# Altium PCB uart.PcbDoc (part 2 of 3)
Units mil, origin at the board's own origin, x right, y up, seen from the top; angles counter-clockwise.
Board outline 2765.94 x 3947.04 mil, 2 copper layers (Top Layer, Bottom Layer); 105 components, 93 nets, 344 pads, 42 vias.
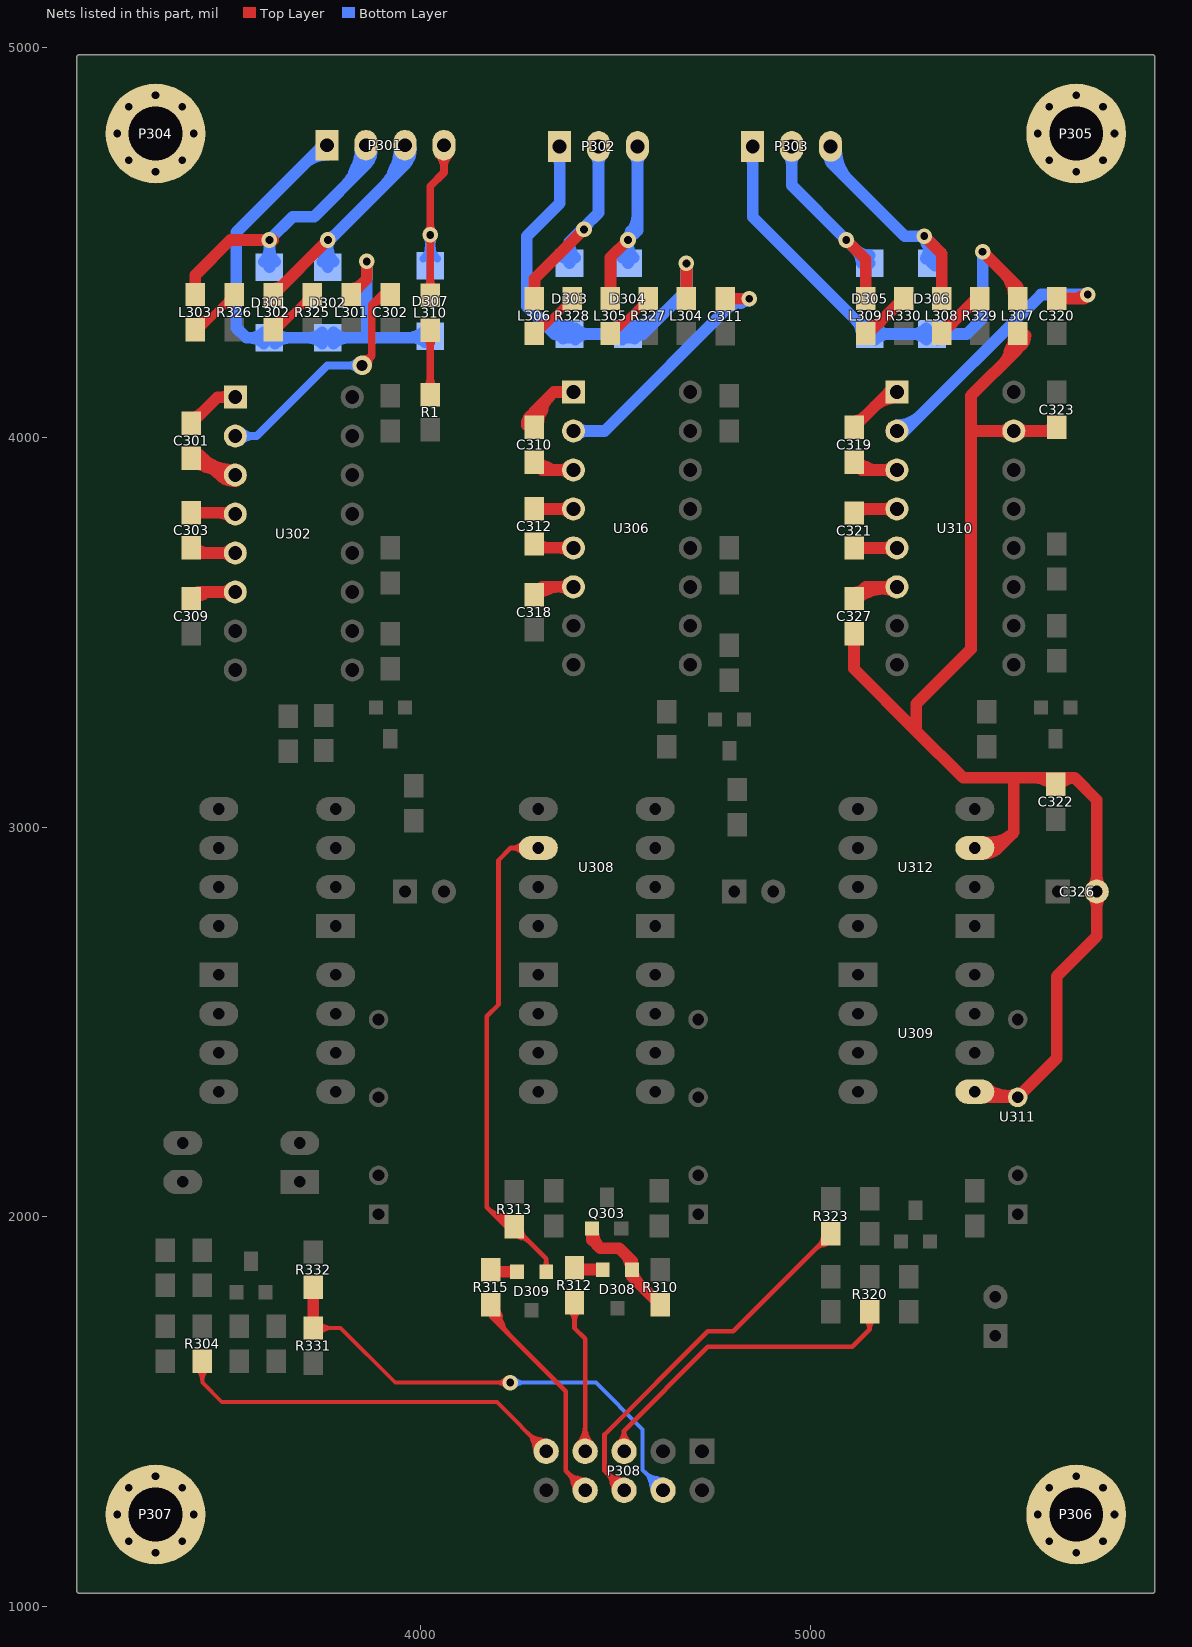
[diagram p2: the nets of this part, all layers, seen from the top]

## Via types
v1: diameter 40, hole 20, Top Layer to Bottom Layer, 40 vias
v2: diameter 50, hole 28, Top Layer to Bottom Layer, 2 vias

## Nets (pads, with @x,y where several pads share a name; then routed paths per layer and width w, separated by ;. In a path a pad name is that pad's centre, name@x,y a point inside that pad or via, vN(x,y) a via of type N, cw(c..) or ccw(c..) an arc to the next point about the centre after c; other vN are vias at no path point) (continued)
GND_5V_3: C322.2 C323.2 C326.2 C327.1 L307.1 U309.5 U310.15 U311.4 U312.3 | length 5137.7
  Top Layer w30: C327.1@5112.2,3496.85 5112.2,3406.85 5272.2,3246.85 ; U309.5@5422.2,2321.42 5436.77,2306.85 U311.4@5532.2,2306.85 5632.2,2406.85 5632.2,2617.2 5735,2720 C326.2@5735,2835 5735,3070 5678.15,3126.85 ; U312.3@5422.2,2946.85 5482.2,2946.85 5522.2,2986.85 ; U309.5@5452.53,2310.11 cw(c5471.21,2291.47) 5484.4,2314.32 ; 5510.59,4218.51 cw(c5565.77,4203.72) L307.1@5537.2,4253.19 ; L307.1@5532.2,4266.85 5532.2,4226.85 5412.2,4106.85 5412.2,4016.85 ; 5598.8,3121.86 ccw(c5610.51,3142.14) C322.2@5624.17,3123.12 ; C322.2@5630,3110 5630,3121.67 C322.2@5635.18,3126.85 ; C323.2@5632.2,4026.85 5622.2,4016.85 U310.15@5522.2,4016.85 5412.2,4016.85 ; C322.2@5636.32,3122.75 ccw(c5647.55,3136.51) 5657.44,3121.75 ; 5272.2,3246.85 5272.2,3316.85 5412.2,3456.85 5412.2,4016.85 ; 5272.2,3246.85 5392.2,3126.85 5522.2,3126.85 ; 5479.83,2946.85 cw(c5479.83,2985.48) 5452.52,2958.16 ccw(c5479.83,2985.48) 5479.83,2946.85 ; 5479.83,2946.85 ccw(c5479.83,2908.22) 5452.52,2935.54 cw(c5479.83,2908.22) 5479.83,2946.85 ; 5487.13,4016.85 cw(c5487.13,3981.78) 5511.93,4006.58 ccw(c5487.13,3981.78) 5487.13,4016.85 ; 5487.13,4016.85 ccw(c5487.13,4051.92) 5511.93,4027.12 cw(c5487.13,4051.92) 5487.13,4016.85 ; 5497.35,2311.58 ccw(c5507.53,2349.58) U311.4@5527.2,2315.51 ; 5497.35,2311.58 ccw(c5507.53,2349.58) U311.4@5527.2,2315.51 ; 5497.35,2311.58 ccw(c5507.53,2349.58) U311.4@5527.2,2315.51 ; 5522.2,2986.85 cw(c5460.09,3048.96) 5444.11,2962.58 ccw(c5460.09,3048.96) 5522.2,2986.85 ; 5522.2,2986.85 5522.2,3126.85 ; 5522.2,3126.85 C322.2@5635.18,3126.85 ; 5557.28,4016.85 cw(c5557.28,4051.92) 5532.48,4027.12 ccw(c5557.28,4051.92) 5557.28,4016.85 ; 5557.28,4016.85 ccw(c5557.28,3981.78) 5532.48,4006.58 cw(c5557.28,3981.78) 5557.28,4016.85 ; C322.2@5635.18,3126.85 5678.15,3126.85 ; 5678.15,3126.85 ccw(c5678.15,3072.88) 5637.53,3108.42 cw(c5678.15,3072.88) 5678.15,3126.85 ; 5735,2796.37 cw(c5773.63,2796.37) 5746.31,2823.69 ccw(c5773.63,2796.37) 5735,2796.37 ; 5735,2796.37 ccw(c5696.37,2796.37) 5723.69,2823.69 cw(c5696.37,2796.37) 5735,2796.37 ; 5735,2873.63 cw(c5696.37,2873.63) 5723.69,2846.31 ccw(c5696.37,2873.63) 5735,2873.63 ; 5735,2873.63 ccw(c5773.63,2873.63) 5746.31,2846.31 cw(c5773.63,2873.63) 5735,2873.63 ; U312.3@5438.66,2933.08 ccw(c5447.5,2980.87) 5481.86,2946.51 cw(c5447.5,2980.87) U312.3@5438.66,2933.08 ; U309.5@5452.52,2332.73 ccw(c5515,2395.21) 5515,2306.85 cw(c5515,2395.21) U309.5@5452.52,2332.73 ; 5490.38,4185.03 ccw(c5413.57,4261.85) 5522.2,4261.85 cw(c5413.57,4261.85) 5490.38,4185.03 ; 5541.6,4236.24 ccw(c5515.99,4261.85) 5552.2,4261.85 cw(c5515.99,4261.85) 5541.6,4236.24 ; 5577.25,3126.85 cw(c5577.25,3062.25) 5622.93,3107.93 ccw(c5577.25,3062.25) 5577.25,3126.85 ; 5595.99,4016.85 ccw(c5595.99,4058.06) 5625.13,4028.92 cw(c5595.99,4058.06) 5595.99,4016.85
NetC301_1: C301.1 U302.1 | length 307.3
  Top Layer w30: C301.1@3412.2,4036.85 3479.06,4103.7 U302.1@3524.72,4103.7 ; 3489.65,4103.7 cw(c3489.65,4068.63) 3514.45,4093.43 ccw(c3489.65,4068.63) 3489.65,4103.7 ; 3489.65,4103.7 ccw(c3489.65,4138.77) 3514.45,4113.97 cw(c3489.65,4138.77) 3489.65,4103.7 ; C301.1@3412.2,4051.85 ccw(c3412.2,4088.06) 3437.81,4062.46 cw(c3412.2,4088.06) C301.1@3412.2,4051.85
NetC301_2: C301.2 U302.3 | length 833.2
  Top Layer w30: C301.2@3412.2,3946.85 3442.2,3946.85 ; C301.2@3420.62,3947.25 ccw(c3468.72,3978.06) 3456.5,3922.26 ; 3458.83,3928.37 cw(c3445.82,3846.41) U302.3@3512.97,3895.17 ; U302.3@3524.72,3903.7 3485.35,3903.7 ; 3442.21,3946.85 ccw(c3512.8,4017.44) 3523.21,3918.15 cw(c3512.8,4017.44) 3442.21,3946.85 ; 3442.2,3946.85 3485.35,3903.7 ; 3485.35,3903.7 ccw(c3417.12,3835.48) 3412.67,3931.86 cw(c3417.12,3835.48) 3485.35,3903.7 ; 3489.65,3903.7 cw(c3489.65,3868.63) 3514.45,3893.43 ccw(c3489.65,3868.63) 3489.65,3903.7 ; 3489.65,3903.7 ccw(c3489.65,3938.77) 3514.45,3913.97 cw(c3489.65,3938.77) 3489.65,3903.7 ; C301.2@3411.28,3961.83 cw(c3412.88,3927.31) 3437.31,3951.75 ccw(c3412.88,3927.31) C301.2@3411.28,3961.83 ; 3486.7,3902.36 ccw(c3521.24,3936.9) 3526.34,3888.31 cw(c3521.24,3936.9) 3486.7,3902.36
NetC302_2: C302.2 U302.2 | length 1145.9
  Top Layer w20: v2(3850,4185) 3875,4210 ; C302.2@3922.2,4366.85 3901.85,4366.85 3875,4340 ; 3875,4210 cw(c3850.84,4234.15) 3850.26,4200 ccw(c3850.84,4234.15) 3875,4210 ; 3875,4210 ccw(c3899.15,4185.84) 3865,4185.26 cw(c3899.15,4185.84) 3875,4210 ; 3875,4210 3875,4340 ; 3875,4340 cw(c3901.64,4313.37) 3916.35,4348.04 ccw(c3901.64,4313.37) 3875,4340 ; 3895.97,4360.97 cw(c3914.13,4342.82) 3924.16,4366.45 ccw(c3914.13,4342.82) 3895.97,4360.97
  Bottom Layer w20: U302.2@3524.72,4003.7 3579.06,4003.7 3760.35,4185 v2(3850,4185) ; 3571.87,4003.7 cw(c3571.87,4050.84) 3538.53,4017.51 ccw(c3571.87,4050.84) 3571.87,4003.7 ; 3571.87,4003.7 ccw(c3571.87,3956.56) 3538.53,3989.89 cw(c3571.87,3956.56) 3571.87,4003.7 ; 3813.79,4185 cw(c3813.79,4148.79) 3839.39,4174.39 ccw(c3813.79,4148.79) 3813.79,4185 ; 3813.79,4185 ccw(c3813.79,4221.21) 3839.39,4195.61 cw(c3813.79,4221.21) 3813.79,4185
NetC303_1: C303.1 U302.5 | length 309.8
  Top Layer w30: C303.1@3412.2,3716.85 3425.35,3703.7 U302.5@3524.72,3703.7 ; 3489.65,3703.7 cw(c3489.65,3668.63) 3514.45,3693.43 ccw(c3489.65,3668.63) 3489.65,3703.7 ; 3489.65,3703.7 ccw(c3489.65,3738.77) 3514.45,3713.97 cw(c3489.65,3738.77) 3489.65,3703.7 ; C303.1@3419.28,3718.92 ccw(c3456.02,3755.67) 3456.02,3703.7 cw(c3456.02,3755.67) C303.1@3419.28,3718.92
NetC303_2: C303.2 U302.4 | length 185.8
  Top Layer w30: C303.2@3412.2,3806.85 3521.57,3806.85 U302.4@3524.72,3803.7 ; 3482.05,3806.85 cw(c3482.05,3761.02) 3514.45,3793.43 ccw(c3482.05,3761.02) 3482.05,3806.85
NetC309_2: C309.2 U302.6 | length 358
  Top Layer w30: C309.2@3412.2,3586.85 3429.06,3603.7 U302.6@3524.72,3603.7 ; C309.2@3418.04,3599.97 ccw(c3431.7,3618.99) 3443.41,3598.71 ; 3489.65,3603.7 cw(c3489.65,3568.63) 3514.45,3593.43 ccw(c3489.65,3568.63) 3489.65,3603.7 ; 3489.65,3603.7 ccw(c3489.65,3638.77) 3514.45,3613.97 cw(c3489.65,3638.77) 3489.65,3603.7 ; C309.2@3419.28,3584.78 cw(c3464.96,3539.1) 3464.96,3603.7 ccw(c3464.96,3539.1) C309.2@3419.28,3584.78
NetC310_1: C310.1 U306.1 | length 543.3
  Top Layer w30: C310.1@4287.2,4040.51 ccw(c4258.64,4089.98) 4313.82,4075.19 ; C310.1@4292.2,4026.85 4292.2,4066.85 4342.2,4116.85 U306.1@4392.2,4116.85 ; 4357.13,4116.85 cw(c4357.13,4081.78) 4381.93,4106.58 ccw(c4357.13,4081.78) 4357.13,4116.85 ; 4357.13,4116.85 ccw(c4357.13,4151.92) 4381.93,4127.12 cw(c4357.13,4151.92) 4357.13,4116.85 ; C310.1@4272.2,4031.85 cw(c4308.42,4031.85) 4282.81,4057.46 ccw(c4308.42,4031.85) C310.1@4272.2,4031.85 ; C310.1@4302.2,4031.85 cw(c4410.84,4031.85) 4334.02,4108.67 ccw(c4410.84,4031.85) C310.1@4302.2,4031.85
NetC310_2: C310.2 U306.3 | length 369.6
  Top Layer w30: C310.2@4292.2,3936.85 4312.2,3916.85 U306.3@4392.2,3916.85 ; C310.2@4296.78,3922.96 cw(c4311.81,3893.78) 4328.23,3922.21 ; 4357.13,3916.85 cw(c4357.13,3881.78) 4381.93,3906.58 ccw(c4357.13,3881.78) 4357.13,3916.85 ; 4357.13,3916.85 ccw(c4357.13,3951.92) 4381.93,3927.12 cw(c4357.13,3951.92) 4357.13,3916.85 ; C310.2@4299.28,3938.92 ccw(c4352.56,3992.21) 4352.56,3916.85 cw(c4352.56,3992.21) C310.2@4299.28,3938.92
NetC311_2: C311.2 U306.2 | length 925.3
  Top Layer w30: C311.2@4782.2,4355.85 v1(4843.2,4355.85)
  Bottom Layer w30: U306.2@4392.2,4016.85 4472.2,4016.85 4811.2,4355.85 v1(4843.2,4355.85) ; 4821.53,4345.04 ccw(c4814.14,4372.63) v1@4838.87,4358.35 ; 4427.28,4016.85 cw(c4427.28,4051.92) 4402.48,4027.12 ccw(c4427.28,4051.92) 4427.28,4016.85 ; 4427.28,4016.85 ccw(c4427.28,3981.78) 4402.48,4006.58 cw(c4427.28,3981.78) 4427.28,4016.85 ; 4780.04,4324.69 cw(c4843.2,4261.52) 4843.2,4350.85 ccw(c4843.2,4261.52) 4780.04,4324.69
NetC312_1: C312.1 U306.5 | length 279.1
  Top Layer w30: C312.1@4292.2,3726.85 4302.2,3716.85 U306.5@4392.2,3716.85 ; 4357.13,3716.85 cw(c4357.13,3681.78) 4381.93,3706.58 ccw(c4357.13,3681.78) 4357.13,3716.85 ; 4357.13,3716.85 ccw(c4357.13,3751.92) 4381.93,3727.12 cw(c4357.13,3751.92) 4357.13,3716.85 ; C312.1@4299.28,3728.92 ccw(c4328.42,3758.06) 4328.42,3716.85 cw(c4328.42,3758.06) C312.1@4299.28,3728.92
NetC312_2: C312.2 U306.4 | length 210.2
  Top Layer w30: C312.2@4292.2,3816.85 U306.4@4392.2,3816.85 ; 4357.13,3816.85 cw(c4357.13,3781.78) 4381.93,3806.58 ccw(c4357.13,3781.78) 4357.13,3816.85 ; 4357.13,3816.85 ccw(c4357.13,3851.92) 4381.93,3827.12 cw(c4357.13,3851.92) 4357.13,3816.85
NetC318_2: C318.2 U306.6 | length 369.6
  Top Layer w30: C318.2@4292.2,3596.85 4312.2,3616.85 U306.6@4392.2,3616.85 ; C318.2@4296.78,3610.74 ccw(c4311.81,3639.92) 4328.23,3611.49 ; 4357.13,3616.85 cw(c4357.13,3581.78) 4381.93,3606.58 ccw(c4357.13,3581.78) 4357.13,3616.85 ; 4357.13,3616.85 ccw(c4357.13,3651.92) 4381.93,3627.12 cw(c4357.13,3651.92) 4357.13,3616.85 ; C318.2@4299.28,3594.78 cw(c4352.56,3541.5) 4352.56,3616.85 ccw(c4352.56,3541.5) C318.2@4299.28,3594.78
NetC319_1: C319.1 U310.1 | length 335.1
  Top Layer w30: C319.1@5112.2,4026.85 5202.2,4116.85 U310.1@5222.2,4116.85 ; C319.1@5112.2,4041.85 ccw(c5112.2,4078.06) 5137.81,4052.46 cw(c5112.2,4078.06) C319.1@5112.2,4041.85 ; 5163.26,4077.91 cw(c5222.2,4018.97) 5222.2,4102.32 ccw(c5222.2,4018.97) 5163.26,4077.91
NetC319_2: C319.2 U310.3 | length 379.6
  Top Layer w30: C319.2@5112.2,3936.85 5132.2,3916.85 U310.3@5222.2,3916.85 ; C319.2@5116.78,3922.96 cw(c5131.81,3893.78) 5148.23,3922.21 ; 5187.13,3916.85 cw(c5187.13,3881.78) 5211.93,3906.58 ccw(c5187.13,3881.78) 5187.13,3916.85 ; 5187.13,3916.85 ccw(c5187.13,3951.92) 5211.93,3927.12 cw(c5187.13,3951.92) 5187.13,3916.85 ; C319.2@5119.28,3938.92 ccw(c5172.56,3992.21) 5172.56,3916.85 cw(c5172.56,3992.21) C319.2@5119.28,3938.92
NetC320_2: C320.2 U310.2 | length 943.7
  Top Layer w30: C320.2@5632.2,4356.85 5702.2,4356.85 v1(5712.2,4366.85) ; 5690.37,4359.82 cw(c5703.12,4337.74) v1@5710.71,4362.08 ; 5675.99,4356.85 ccw(c5675.99,4403.06) 5708.67,4370.39 cw(c5675.99,4403.06) 5675.99,4356.85
  Bottom Layer w30: U310.2@5222.2,4016.85 5242.2,4016.85 5592.2,4366.85 v1(5712.2,4366.85) ; U310.2@5222.2,4031.38 ccw(c5222.2,4114.73) 5281.15,4055.79 cw(c5222.2,4114.73) U310.2@5222.2,4031.38
NetC321_1: C321.1 U310.5 | length 220.4
  Top Layer w30: C321.1@5112.2,3716.44 5221.79,3716.44 U310.5@5222.2,3716.85 ; 5186.13,3716.44 ccw(c5186.13,3752.92) 5211.93,3727.12 cw(c5186.13,3752.92) 5186.13,3716.44 ; 5188.13,3716.44 cw(c5188.13,3682.78) 5211.93,3706.58 ccw(c5188.13,3682.78) 5188.13,3716.44
NetC321_2: C321.2 U310.4 | length 291.5
  Top Layer w30: C321.2@5112.2,3806.44 5122.62,3816.85 U310.4@5222.2,3816.85 ; 5187.13,3816.85 cw(c5187.13,3781.78) 5211.93,3806.58 ccw(c5187.13,3781.78) 5187.13,3816.85 ; 5187.13,3816.85 ccw(c5187.13,3851.92) 5211.93,3827.12 cw(c5187.13,3851.92) 5187.13,3816.85 ; C321.2@5119.28,3804.37 cw(c5149.42,3774.22) 5149.42,3816.85 ccw(c5149.42,3774.22) C321.2@5119.28,3804.37
NetC327_2: C327.2 U310.6 | length 551.6
  Top Layer w30: C327.2@5112.2,3586.85 5142.2,3616.85 U310.6@5222.2,3616.85 ; C327.2@5114.79,3601.51 ccw(c5129.58,3656.68) 5158.14,3607.22 ; 5171.23,3610.02 cw(c5186.14,3554.38) U310.6@5214.94,3604.27 ; 5187.13,3616.85 cw(c5187.13,3581.78) 5211.93,3606.58 ccw(c5187.13,3581.78) 5187.13,3616.85 ; 5187.13,3616.85 ccw(c5187.13,3651.92) 5211.93,3627.12 cw(c5187.13,3651.92) 5187.13,3616.85 ; C327.2@5112.2,3601.85 ccw(c5112.2,3638.06) 5137.81,3612.46 cw(c5112.2,3638.06) C327.2@5112.2,3601.85 ; C327.2@5119.28,3584.78 cw(c5196.7,3507.35) 5196.7,3616.85 ccw(c5196.7,3507.35) C327.2@5119.28,3584.78
NetD301_1: D301.1 D302.1 D307.1 L301.2 P301.1 | length 2342
  Top Layer w30: L301.2@3822.2,4366.85 3862.2,4406.85 v1(3862.2,4451.85) ; L301.2@3822.2,4381.85 ccw(c3822.2,4418.06) 3847.81,4392.46 cw(c3822.2,4418.06) L301.2@3822.2,4381.85
  Bottom Layer w30: P301.1@3760,4750 3750.35,4750 3527.2,4526.85 3527.2,4281.85 3553.31,4255.75 D301.1@3612.2,4255.75 D302.1@3762.2,4255.75 3870,4255.75 ; v1(3862.2,4451.85) 3862.2,4263.54 3870,4255.75 ; D307.1@4025,4259.45 4021.3,4255.75 3870,4255.75 ; 3562.88,4255.75 cw(c3562.88,4206.42) 3597.76,4241.3 ccw(c3562.88,4206.42) 3562.88,4255.75 ; 3562.88,4255.75 ccw(c3562.88,4305.08) 3597.76,4270.2 cw(c3562.88,4305.08) 3562.88,4255.75 ; 3661.53,4255.75 cw(c3661.53,4305.08) 3626.65,4270.2 ccw(c3661.53,4305.08) 3661.53,4255.75 ; 3661.53,4255.75 ccw(c3661.53,4206.42) 3626.65,4241.3 cw(c3661.53,4206.42) 3661.53,4255.75 ; 3712.88,4255.75 cw(c3712.88,4206.42) 3747.76,4241.3 ccw(c3712.88,4206.42) 3712.88,4255.75 ; 3712.88,4255.75 ccw(c3712.88,4305.08) 3747.76,4270.2 cw(c3712.88,4305.08) 3712.88,4255.75 ; 3811.53,4255.75 cw(c3811.53,4305.08) 3776.65,4270.2 ccw(c3811.53,4305.08) 3811.53,4255.75 ; 3811.53,4255.75 ccw(c3811.53,4206.42) 3776.65,4241.3 cw(c3811.53,4206.42) 3811.53,4255.75 ; 3701.93,4701.58 cw(c3760,4643.51) 3760,4725.63 ccw(c3760,4643.51) 3701.93,4701.58 ; 3966.74,4255.75 ccw(c3966.74,4317.71) 4010.55,4273.9 cw(c3966.74,4317.71) 3966.74,4255.75 ; 3984.6,4255.75 cw(c3984.6,4219.05) 4010.55,4245 ccw(c3984.6,4219.05) 3984.6,4255.75
NetD301_2: D301.2 L303.2 P301.2 | length 1366.4
  Top Layer w30: L303.2@3422.2,4366.85 3422.2,4416.85 3512.2,4506.85 v1(3612.2,4506.85) v1@3622.2,4506.85
  Bottom Layer w30: D301.2@3612.2,4436.85 v1(3612.2,4506.85) 3672.2,4566.85 3726.85,4566.85 3860,4700 P301.2@3860,4750 ; 3828.6,4677.19 cw(c3908.75,4655.71) P301.2@3867.26,4727.58 ; 3612.2,4486.18 cw(c3562.88,4486.18) 3597.76,4451.3 ccw(c3562.88,4486.18) 3612.2,4486.18 ; 3612.2,4486.18 ccw(c3661.53,4486.18) 3626.65,4451.3 cw(c3661.53,4486.18) 3612.2,4486.18 ; 3860,4705.09 cw(c3895.07,4705.09) 3870.27,4729.89 ccw(c3895.07,4705.09) 3860,4705.09 ; 3860,4705.09 ccw(c3824.93,4705.09) 3849.73,4729.89 cw(c3824.93,4705.09) 3860,4705.09 ; 3806.8,4646.8 ccw(c3713.45,4740.16) 3845.47,4740.16 cw(c3713.45,4740.16) 3806.8,4646.8 ; 3858.02,4698.02 ccw(c3815.88,4740.16) 3875.47,4740.16 cw(c3815.88,4740.16) 3858.02,4698.02
NetD302_2: D302.2 L302.2 P301.3 | length 1320.6
  Top Layer w30: L302.2@3622.2,4366.85 v1(3762.2,4506.85) ; L302.2@3622.2,4381.85 ccw(c3622.2,4418.06) 3647.81,4392.46 cw(c3622.2,4418.06) L302.2@3622.2,4381.85
  Bottom Layer w30: D302.2@3762.2,4436.85 v1(3762.2,4506.85) 3766.85,4506.85 3960,4700 P301.3@3960,4750 ; 3928.6,4677.19 cw(c4008.75,4655.71) P301.3@3967.26,4727.58 ; 3762.2,4486.18 cw(c3712.88,4486.18) 3747.76,4451.3 ccw(c3712.88,4486.18) 3762.2,4486.18 ; 3762.2,4486.18 ccw(c3811.53,4486.18) 3776.65,4451.3 cw(c3811.53,4486.18) 3762.2,4486.18 ; 3960,4705.09 cw(c3995.07,4705.09) 3970.27,4729.89 ccw(c3995.07,4705.09) 3960,4705.09 ; 3960,4705.09 ccw(c3924.93,4705.09) 3949.73,4729.89 cw(c3924.93,4705.09) 3960,4705.09 ; v1@3762.2,4511.85 ccw(c3762.2,4535.14) 3778.67,4518.67 cw(c3762.2,4535.14) v1@3762.2,4511.85 ; 3906.8,4646.8 ccw(c3813.45,4740.16) 3945.47,4740.16 cw(c3813.45,4740.16) 3906.8,4646.8 ; 3958.02,4698.02 ccw(c3915.88,4740.16) 3975.47,4740.16 cw(c3915.88,4740.16) 3958.02,4698.02
NetD303_1: D303.1 D304.1 L304.2 P302.1 | length 2390.5
  Top Layer w30: L304.2@4682.2,4356.85 v1(4682.2,4446.85)
  Bottom Layer w30: P302.1@4356.78,4746.85 4356.78,4601.43 4272.2,4516.85 4272.2,4336.85 4343.31,4265.75 ; v1(4682.2,4446.85) 4682.2,4376.85 4571.1,4265.75 ; 4343.31,4265.75 cw(c4343.31,4238.94) 4365.38,4254.15 ccw(c4343.31,4238.94) 4343.31,4265.75 ; 4343.31,4265.75 ccw(c4343.31,4292.55) 4365.38,4277.34 cw(c4343.31,4292.55) 4343.31,4265.75 ; 4343.31,4265.75 D303.1@4382.2,4265.75 D304.1@4532.2,4265.75 4571.1,4265.75 ; 4356.78,4701.94 cw(c4391.85,4701.94) 4367.05,4726.74 ccw(c4391.85,4701.94) 4356.78,4701.94 ; 4356.78,4701.94 ccw(c4321.71,4701.94) 4346.51,4726.74 cw(c4321.71,4701.94) 4356.78,4701.94 ; 4431.53,4265.75 cw(c4431.53,4315.08) 4396.65,4280.2 ccw(c4431.53,4315.08) 4431.53,4265.75 ; 4431.53,4265.75 ccw(c4431.53,4216.42) 4396.65,4251.3 cw(c4431.53,4216.42) 4431.53,4265.75 ; 4482.88,4265.75 cw(c4482.88,4216.42) 4517.76,4251.3 ccw(c4482.88,4216.42) 4482.88,4265.75 ; 4482.88,4265.75 ccw(c4482.88,4315.08) 4517.76,4280.2 cw(c4482.88,4315.08) 4482.88,4265.75 ; 4571.1,4265.75 cw(c4571.1,4292.55) 4549.03,4277.34 ccw(c4571.1,4292.55) 4571.1,4265.75 ; 4571.1,4265.75 ccw(c4571.1,4238.94) 4549.03,4254.15 cw(c4571.1,4238.94) 4571.1,4265.75 ; 4280.92,4328.13 ccw(c4382.2,4429.42) 4382.2,4286.18 cw(c4382.2,4429.42) 4280.92,4328.13 ; 4332.13,4276.92 ccw(c4382.2,4326.99) 4382.2,4256.18 cw(c4382.2,4326.99) 4332.13,4276.92 ; D304.1@4532.2,4256.18 ccw(c4532.2,4326.99) 4582.28,4276.92 cw(c4532.2,4326.99) D304.1@4532.2,4256.18 ; D304.1@4532.2,4286.18 ccw(c4532.2,4429.42) 4633.49,4328.13 cw(c4532.2,4429.42) D304.1@4532.2,4286.18
NetD303_2: D303.2 L306.2 P302.2 | length 906.9
  Top Layer w30: L306.2@4292.2,4356.85 4292.2,4406.85 v1(4419.49,4534.14)
  Bottom Layer w30: D303.2@4382.2,4446.85 4382.2,4501.85 v1@4419.49,4539.14 ; v1(4419.49,4534.14) v1@4419.49,4539.14 ; P302.2@4456.78,4746.85 4456.78,4576.43 v1@4419.49,4539.14 ; 4382.2,4496.18 cw(c4332.88,4496.18) 4367.76,4461.3 ccw(c4332.88,4496.18) 4382.2,4496.18 ; 4382.2,4496.18 ccw(c4431.53,4496.18) 4396.65,4461.3 cw(c4431.53,4496.18) 4382.2,4496.18 ; 4456.78,4701.94 cw(c4491.85,4701.94) 4467.05,4726.74 ccw(c4491.85,4701.94) 4456.78,4701.94 ; 4456.78,4701.94 ccw(c4421.71,4701.94) 4446.51,4726.74 cw(c4421.71,4701.94) 4456.78,4701.94 ; 4402.42,4522.07 cw(c4419.49,4505) 4419.49,4529.14 ccw(c4419.49,4505) 4402.42,4522.07 ; v1@4424.49,4534.14 cw(c4448.63,4534.14) 4431.56,4551.21 ccw(c4448.63,4534.14) v1@4424.49,4534.14
NetD304_2: D304.2 L305.2 P302.3 | length 917.2
  Top Layer w30: L305.2@4487.2,4356.85 4487.2,4461.85 v1(4532.2,4506.85)
  Bottom Layer w30: D304.2@4532.2,4446.85 v1(4532.2,4506.85) 4556.78,4531.43 P302.3@4556.78,4746.85 ; v1@4537.03,4508.14 cw(c4564.62,4515.54) 4539.89,4529.82 ; v1@4532.2,4496.18 cw(c4482.88,4496.18) 4517.76,4461.3 ccw(c4482.88,4496.18) v1@4532.2,4496.18 ; v1@4532.2,4496.18 ccw(c4581.53,4496.18) 4546.65,4461.3 cw(c4581.53,4496.18) v1@4532.2,4496.18 ; 4556.78,4701.94 cw(c4591.85,4701.94) 4567.05,4726.74 ccw(c4591.85,4701.94) 4556.78,4701.94 ; 4556.78,4701.94 ccw(c4521.71,4701.94) 4546.51,4726.74 cw(c4521.71,4701.94) 4556.78,4701.94 ; v1@4528.67,4510.39 ccw(c4460.8,4578.25) 4556.78,4578.25 cw(c4460.8,4578.25) v1@4528.67,4510.39
NetD305_1: D305.1 D306.1 L307.2 P303.1 | length 2147.3
  Top Layer w30: v1(5442.2,4476.85) 5532.2,4386.85 L307.2@5532.2,4356.85 ; 5510.59,4405.19 ccw(c5565.77,4419.98) L307.2@5537.2,4370.51 ; 5497.46,4421.6 cw(c5437.71,4361.85) 5522.2,4361.85 ccw(c5437.71,4361.85) 5497.46,4421.6
  Bottom Layer w30: P303.1@4852.2,4746.85 4852.2,4565.75 D305.1@5152.2,4265.75 D306.1@5312.2,4265.75 5401.1,4265.75 5442.2,4306.85 v1(5442.2,4476.85) ; 4852.2,4701.94 cw(c4887.28,4701.94) 4862.48,4726.74 ccw(c4887.28,4701.94) 4852.2,4701.94 ; 4852.2,4701.94 ccw(c4817.13,4701.94) 4841.93,4726.74 cw(c4817.13,4701.94) 4852.2,4701.94 ; D305.1@5117.32,4300.63 cw(c5082.44,4265.75) 5131.77,4265.75 ccw(c5082.44,4265.75) D305.1@5117.32,4300.63 ; D305.1@5117.32,4300.63 ccw(c5152.2,4335.51) 5152.2,4286.18 cw(c5152.2,4335.51) D305.1@5117.32,4300.63 ; 5201.53,4265.75 cw(c5201.53,4315.08) 5166.65,4280.2 ccw(c5201.53,4315.08) 5201.53,4265.75 ; 5201.53,4265.75 ccw(c5201.53,4216.42) 5166.65,4251.3 cw(c5201.53,4216.42) 5201.53,4265.75 ; 5262.88,4265.75 cw(c5262.88,4216.42) 5297.76,4251.3 ccw(c5262.88,4216.42) 5262.88,4265.75 ; 5262.88,4265.75 ccw(c5262.88,4315.08) 5297.76,4280.2 cw(c5262.88,4315.08) 5262.88,4265.75 ; 5361.53,4265.75 cw(c5361.53,4315.08) 5326.65,4280.2 ccw(c5361.53,4315.08) 5361.53,4265.75 ; 5361.53,4265.75 ccw(c5361.53,4216.42) 5326.65,4251.3 cw(c5361.53,4216.42) 5361.53,4265.75
NetD305_2: D305.2 L309.2 P303.2 | length 818.7
  Top Layer w30: v1(5092.2,4506.85) 5142.2,4456.85 L309.2@5142.2,4356.85
  Bottom Layer w30: P303.2@4952.2,4746.85 4952.2,4646.85 v1(5092.2,4506.85) D305.2@5152.2,4446.85 ; 4952.2,4701.94 cw(c4987.28,4701.94) 4962.48,4726.74 ccw(c4987.28,4701.94) 4952.2,4701.94 ; 4952.2,4701.94 ccw(c4917.13,4701.94) 4941.93,4726.74 cw(c4917.13,4701.94) 4952.2,4701.94 ; D305.2@5117.32,4481.73 cw(c5082.44,4446.85) 5131.77,4446.85 ccw(c5082.44,4446.85) D305.2@5117.32,4481.73 ; D305.2@5117.32,4481.73 ccw(c5152.2,4516.61) 5152.2,4467.28 cw(c5152.2,4516.61) D305.2@5117.32,4481.73
NetD306_2: D306.2 L308.2 P303.3 | length 1546.3
  Top Layer w30: v1(5292.2,4516.85) 5337.2,4471.85 L308.2@5337.2,4356.85
  Bottom Layer w30: P303.3@5044.94,4724.43 cw(c5003.45,4652.56) 5083.6,4674.04 ; P303.3@5052.2,4746.85 5052.2,4706.85 ; D306.2@5295.98,4459.26 ccw(c5265.51,4482.57) 5302.56,4492.49 ; v1@5297.03,4515.56 ccw(c5324.62,4508.16) 5299.89,4493.88 ; 5303.41,4489.32 ccw(c5342.82,4499.89) D306.2@5322.42,4464.55 ; D306.2@5312.2,4446.85 5312.2,4496.85 v1(5292.2,4516.85) ; 5052.2,4706.85 cw(c5076.24,4706.85) 5061.26,4725.65 ccw(c5076.24,4706.85) 5052.2,4706.85 ; 5052.2,4706.85 ccw(c5028.17,4706.85) 5043.15,4725.65 cw(c5028.17,4706.85) 5052.2,4706.85 ; 5052.2,4706.85 5242.2,4516.85 v1(5292.2,4516.85) ; v1@5292.21,4516.85 cw(c5261.26,4485.91) 5295.99,4459.28 ccw(c5261.26,4485.91) v1@5292.21,4516.85 ; 5312.2,4496.18 cw(c5262.88,4496.18) 5297.76,4461.3 ccw(c5262.88,4496.18) 5312.2,4496.18 ; 5312.2,4496.18 ccw(c5361.53,4496.18) 5326.65,4461.3 cw(c5361.53,4496.18) 5312.2,4496.18 ; P303.3@5066.73,4737.01 ccw(c5174.61,4737.01) 5098.33,4660.73 cw(c5174.61,4737.01) P303.3@5066.73,4737.01 ; v1@5288.67,4513.31 cw(c5231.85,4456.5) 5312.2,4456.5 ccw(c5231.85,4456.5) v1@5288.67,4513.31 ; 5316.4,4492.65 cw(c5288.66,4464.9) 5319.8,4441.03 ccw(c5288.66,4464.9) 5316.4,4492.65
NetD307_2: D307.2 L310.2 P301.4 | length 1350.2
  Top Layer w20: L310.2@4025,4365 v1(4025,4520) 4025,4645 4060,4680 P301.4@4060,4750 ; 4025,4406.21 cw(c3988.79,4406.21) 4014.39,4380.61 ccw(c3988.79,4406.21) 4025,4406.21 ; 4025,4406.21 ccw(c4061.21,4406.21) 4035.61,4380.61 cw(c4061.21,4406.21) 4025,4406.21 ; 4025,4495.86 cw(c4049.14,4495.86) 4032.07,4512.93 ccw(c4049.14,4495.86) 4025,4495.86 ; 4025,4495.86 ccw(c4000.86,4495.86) 4017.93,4512.93 cw(c4000.86,4495.86) 4025,4495.86 ; 4025,4544.14 cw(c4000.86,4544.14) 4017.93,4527.07 ccw(c4000.86,4544.14) 4025,4544.14 ; 4025,4544.14 ccw(c4049.14,4544.14) 4032.07,4527.07 cw(c4049.14,4544.14) 4025,4544.14 ; 4060,4693.01 cw(c4107.14,4693.01) 4073.81,4726.35 ccw(c4107.14,4693.01) 4060,4693.01 ; 4060,4693.01 ccw(c4012.86,4693.01) 4046.19,4726.35 cw(c4012.86,4693.01) 4060,4693.01
  Bottom Layer w20: D307.2@4025,4440.55 v1(4025,4520) ; v1@4016.34,4515 cw(c3981.62,4494.95) 4020.34,4484.58 ; v1@4016.34,4515 cw(c3981.62,4494.95) 4020.34,4484.58 ; v1@4016.34,4515 cw(c3981.62,4494.95) 4020.34,4484.58 ; 4025,4495.86 cw(c4049.14,4495.86) 4032.07,4512.93 ccw(c4049.14,4495.86) 4025,4495.86 ; 4025,4495.86 ccw(c4000.86,4495.86) 4017.93,4512.93 cw(c4000.86,4495.86) 4025,4495.86 ; v1@4025,4501.95 cw(c3963.6,4501.95) 4007.02,4458.54 ccw(c3963.6,4501.95) v1@4025,4501.95 ; v1@4025,4501.95 ccw(c4086.4,4501.95) 4042.98,4458.54 cw(c4086.4,4501.95) v1@4025,4501.95 ; 4029.66,4484.58 cw(c4068.38,4494.95) v1@4033.66,4515 ; 4029.66,4484.58 cw(c4068.38,4494.95) v1@4033.66,4515 ; 4029.66,4484.58 cw(c4068.38,4494.95) v1@4033.66,4515
NetD308_1: D308.1 Q303.1 R310.1 | length 630
  Top Layer w30: Q303.1@4440,1970 4440,1941.06 4461.06,1920 ; R310.1@4615,1775 4614.64,1775 4542.4,1847.24 D308.1@4542.4,1864.21 4542.4,1887.6 4510,1920 4461.06,1920 ; 4461.05,1920 cw(c4505.26,1964.21) 4442.99,1969.73 ccw(c4505.26,1964.21) 4461.05,1920 ; 4521.92,1908.08 cw(c4479.04,1865.2) 4539.69,1865.2 ccw(c4479.04,1865.2) 4521.92,1908.08 ; D308.1@4545.12,1863.23 ccw(c4590.27,1863.23) 4558.34,1831.3 cw(c4590.27,1863.23) D308.1@4545.12,1863.23 ; 4588.79,1800.86 ccw(c4615,1827.07) 4615,1790 cw(c4615,1827.07) 4588.79,1800.86
NetD308_2: D308.2 R312.2 | length 75
  Top Layer w30: R312.2@4395,1870 4400,1865 4466.81,1865 D308.2@4467.6,1864.21
NetD309_1: D309.1 R313.1 U308.6 | length 2135.3
  Top Layer w12: 4212.05,2004.38 cw(c4202.01,1954.8) R313.1@4244.17,1982.76 ; 4212.38,1992.49 ccw(c4216.9,2014.82) R313.1@4229.5,1995.83 ; 4214.12,1992.14 cw(c4208.59,1964.79) R313.1@4233.7,1976.95 ; R313.1@4235.21,1968.58 ccw(c4266.81,1977.94) R313.1@4258.28,1946.1 ; U308.6@4302.2,2946.85 4231.85,2946.85 ; D309.1@4322.4,1859.21 4322.4,1892.6 R313.1@4240,1975 4220,1975 4170,2025 ; 4170,2025 ccw(c4233.27,2088.26) 4238.82,1998.96 cw(c4233.27,2088.26) 4170,2025 ; 4170,2025 4170,2515 4200,2545 4200,2915 4231.85,2946.85 ; 4231.85,2946.85 cw(c4231.85,2906.61) 4263.53,2931.43 ccw(c4231.85,2906.61) 4231.85,2946.85 ; 4231.85,2946.85 ccw(c4231.85,2987.09) 4263.53,2962.27 cw(c4231.85,2987.09) 4231.85,2946.85 ; 4322.4,1888.48 cw(c4294.12,1888.48) 4314.12,1868.48 ccw(c4294.12,1888.48) 4322.4,1888.48 ; 4322.4,1888.48 ccw(c4350.69,1888.48) 4330.69,1868.48 cw(c4350.69,1888.48) 4322.4,1888.48 ; 4188.81,2006.19 ccw(c4235.47,2052.84) 4239.57,1986.99 cw(c4235.47,2052.84) 4188.81,2006.19 ; 4207.63,1987.37 ccw(c4237.67,2017.42) 4240.31,1975.01 cw(c4237.67,2017.42) 4207.63,1987.37 ; R313.1@4240,1951 cw(c4240,1893.06) 4280.97,1934.03 ccw(c4240,1893.06) R313.1@4240,1951 ; R313.1@4240,1963 cw(c4240,1934.03) 4260.49,1954.51 ccw(c4240,1934.03) R313.1@4240,1963 ; R313.1@4259,1970 ccw(c4292.8,1970) 4268.9,1946.1 cw(c4292.8,1970) R313.1@4259,1970
NetD309_2: D309.2 R315.1 | length 112.1
  Top Layer w30: R315.1@4180,1865 4185.79,1859.21 D309.2@4247.6,1859.21 ; R315.1@4187.07,1867.07 ccw(c4206.04,1886.04) 4206.04,1859.21 cw(c4206.04,1886.04) R315.1@4187.07,1867.07
NetL302_1: L302.1 R325.1 | length 393.1
  Top Layer w20: L302.1@3617.76,4284.13 cw(c3647.87,4268.69) L302.1@3639.11,4301.38 ; L302.1@3622.2,4276.85 3632.2,4276.85 R325.1@3722.2,4366.85 ; L302.1@3622.2,4296.85 ccw(c3622.2,4369.28) 3673.42,4318.06 cw(c3622.2,4369.28) L302.1@3622.2,4296.85 ; 3688.06,4332.71 cw(c3722.2,4298.57) 3722.2,4346.85 ccw(c3722.2,4298.57) 3688.06,4332.71 ; R325.1@3700.13,4344.78 ccw(c3683.06,4361.85) 3707.2,4361.85 cw(c3683.06,4361.85) R325.1@3700.13,4344.78
NetL303_1: L303.1 R326.1 | length 393.1
  Top Layer w20: L303.1@3417.76,4284.13 cw(c3447.87,4268.69) L303.1@3439.11,4301.38 ; L303.1@3422.2,4276.85 3432.2,4276.85 R326.1@3522.2,4366.85 ; L303.1@3422.2,4296.85 ccw(c3422.2,4369.28) 3473.42,4318.06 cw(c3422.2,4369.28) L303.1@3422.2,4296.85 ; 3488.06,4332.71 cw(c3522.2,4298.57) 3522.2,4346.85 ccw(c3522.2,4298.57) 3488.06,4332.71 ; R326.1@3500.13,4344.78 ccw(c3483.06,4361.85) 3507.2,4361.85 cw(c3483.06,4361.85) R326.1@3500.13,4344.78
NetL305_1: L305.1 R327.1 | length 352.8
  Top Layer w20: L305.1@4487.2,4266.85 4494.7,4266.85 R327.1@4584.7,4356.85 ; L305.1@4487.2,4286.85 ccw(c4487.2,4353.24) 4534.15,4306.3 cw(c4487.2,4353.24) L305.1@4487.2,4286.85 ; 4550.56,4322.71 cw(c4584.7,4288.57) 4584.7,4336.85 ccw(c4584.7,4288.57) 4550.56,4322.71 ; R327.1@4562.63,4334.78 ccw(c4545.56,4351.85) 4569.7,4351.85 cw(c4545.56,4351.85) R327.1@4562.63,4334.78
NetL306_1: L306.1 R328.1 | length 352.8
  Top Layer w20: L306.1@4292.2,4266.85 4299.7,4266.85 R328.1@4389.7,4356.85 ; L306.1@4292.2,4286.85 ccw(c4292.2,4353.24) 4339.15,4306.3 cw(c4292.2,4353.24) L306.1@4292.2,4286.85 ; 4355.56,4322.71 cw(c4389.7,4288.57) 4389.7,4336.85 ccw(c4389.7,4288.57) 4355.56,4322.71 ; R328.1@4367.63,4334.78 ccw(c4350.56,4351.85) 4374.7,4351.85 cw(c4350.56,4351.85) R328.1@4367.63,4334.78
NetL308_1: L308.1 R329.1 | length 277
  Top Layer w30: L308.1@5337.2,4266.85 5337.56,4266.85 5427.56,4356.85 R329.1@5434.7,4356.85 ; L308.1@5337.2,4281.85 ccw(c5337.2,4318.92) 5363.42,4292.71 cw(c5337.2,4318.92) L308.1@5337.2,4281.85 ; 5396.9,4326.19 cw(c5434.7,4288.39) 5434.7,4341.85 ccw(c5434.7,4288.39) 5396.9,4326.19
NetL309_1: L309.1 R330.1 | length 277
  Top Layer w30: L309.1@5142.2,4266.85 5149.35,4266.85 5239.35,4356.85 R330.1@5239.7,4356.85 ; L309.1@5142.2,4281.85 ccw(c5142.2,4335.31) 5180.01,4297.51 cw(c5142.2,4335.31) L309.1@5142.2,4281.85 ; 5213.49,4330.99 cw(c5239.7,4304.78) 5239.7,4341.85 ccw(c5239.7,4304.78) 5213.49,4330.99
NetL310_1: L310.1 R1.1 | length 392.5
  Top Layer w20: R1.1@4025,4110 L310.1@4025,4275 ; 4025,4151.21 cw(c3988.79,4151.21) 4014.39,4125.61 ccw(c3988.79,4151.21) 4025,4151.21 ; 4025,4151.21 ccw(c4061.21,4151.21) 4035.61,4125.61 cw(c4061.21,4151.21) 4025,4151.21 ; 4025,4233.79 cw(c4061.21,4233.79) 4035.61,4259.39 ccw(c4061.21,4233.79) 4025,4233.79 ; 4025,4233.79 ccw(c3988.79,4233.79) 4014.39,4259.39 cw(c3988.79,4233.79) 4025,4233.79
NetP304_1: P304.1 P304.2 P304.3 P304.4 P304.5 P304.6 P304.7 P304.8 P304.9
NetP305_1: P305.1 P305.2 P305.3 P305.4 P305.5 P305.6 P305.7 P305.8 P305.9
NetP306_1: P306.1 P306.2 P306.3 P306.4 P306.5 P306.6 P306.7 P306.8 P306.9
NetP307_1: P307.1 P307.2 P307.3 P307.4 P307.5 P307.6 P307.7 P307.8 P307.9
NetP308_4: P308.4 R331.2 R332.1 | length 2142.1
  Top Layer w10: R331.2@3725,1715 3795,1715 3935,1575 v1(4230,1575) ; 3773.28,1715 cw(c3773.28,1763.28) 3739.14,1729.14 ccw(c3773.28,1763.28) 3773.28,1715 ; 3773.28,1715 ccw(c3773.28,1666.72) 3739.14,1700.86 cw(c3773.28,1666.72) 3773.28,1715 ; 4193.79,1575 cw(c4193.79,1538.79) 4219.39,1564.39 ccw(c4193.79,1538.79) 4193.79,1575 ; 4193.79,1575 ccw(c4193.79,1611.21) 4219.39,1585.61 cw(c4193.79,1611.21) 4193.79,1575
  Top Layer w30: R331.2@3725,1715 R332.1@3725,1820
  Bottom Layer w10: v1(4230,1575) 4450,1575 4570,1455 4570,1350.94 P308.4@4622.2,1298.74 ; 4586.47,1329.48 ccw(c4630.94,1341.39) P308.4@4621.7,1296.29 ; 4590.66,1313.85 ccw(c4627.31,1323.67) P308.4@4619.7,1286.49 ; 4591.47,1334.48 cw(c4579.55,1290.01) P308.4@4624.65,1299.24 ; 4607.1,1330.29 cw(c4597.28,1293.64) P308.4@4634.45,1301.25 ; 4266.21,1575 cw(c4266.21,1611.21) 4240.61,1585.61 ccw(c4266.21,1611.21) 4266.21,1575 ; 4266.21,1575 ccw(c4266.21,1538.79) 4240.61,1564.39 cw(c4266.21,1538.79) 4266.21,1575 ; 4575.26,1345.69 cw(c4528.31,1298.74) 4594.7,1298.74 ccw(c4528.31,1298.74) 4575.26,1345.69 ; 4575.26,1345.69 ccw(c4622.2,1392.63) 4622.2,1326.24 cw(c4622.2,1392.63) 4575.26,1345.69 ; 4592.33,1328.61 cw(c4562.46,1298.74) 4604.7,1298.74 ccw(c4562.46,1298.74) 4592.33,1328.61 ; 4592.33,1328.61 ccw(c4622.2,1358.49) 4622.2,1316.24 cw(c4622.2,1358.49) 4592.33,1328.61
NetP308_5: P308.5 R320.1 | length 1099.4
  Top Layer w12: P308.5@4522.2,1398.74 4522.2,1451.85 ; R320.1@5152.2,1756.85 5152.2,1711.85 ; 4522.2,1451.85 cw(c4482.24,1451.85) 4506.27,1419.91 ccw(c4482.24,1451.85) 4522.2,1451.85 ; 4522.2,1451.85 ccw(c4562.17,1451.85) 4538.14,1419.91 cw(c4562.17,1451.85) 4522.2,1451.85 ; 4522.2,1451.85 4737.2,1666.85 5107.2,1666.85 5152.2,1711.85 ; 5152.2,1711.85 cw(c5184.81,1711.85) 5164.21,1737.12 ccw(c5184.81,1711.85) 5152.2,1711.85 ; 5152.2,1711.85 ccw(c5119.6,1711.85) 5140.2,1737.12 cw(c5119.6,1711.85) 5152.2,1711.85
NetP308_6: P308.6 R323.2 | length 1683.9
  Top Layer w12: 4484.91,1335.23 cw(c4472.4,1288.54) P308.6@4519.76,1298.24 ; 4485.71,1336.03 ccw(c4532.4,1348.55) P308.6@4522.71,1301.19 ; 4490.74,1317.28 ccw(c4528.05,1327.27) P308.6@4520.3,1289.43 ; 4503.67,1330.21 cw(c4493.67,1292.9) P308.6@4531.51,1300.65 ; P308.6@4522.2,1298.74 4472.2,1348.74 4472.2,1441.85 4737.2,1706.85 4802.2,1706.85 R323.2@5052.2,1956.85 ; R323.2@5033.93,1927.95 ccw(c5025.39,1959.79) R323.2@5057,1950.43 ; 4476.97,1343.98 cw(c4431.73,1298.74) 4495.7,1298.74 ccw(c4431.73,1298.74) 4476.97,1343.98 ; 4476.97,1343.98 ccw(c4522.2,1389.22) 4522.2,1325.24 cw(c4522.2,1389.22) 4476.97,1343.98 ; 4497.45,1323.49 cw(c4472.7,1298.74) 4507.7,1298.74 ccw(c4472.7,1298.74) 4497.45,1323.49 ; 4497.45,1323.49 ccw(c4522.2,1348.25) 4522.2,1313.24 cw(c4522.2,1348.25) 4497.45,1323.49 ; 5011.23,1915.88 cw(c5052.2,1874.91) 5052.2,1932.85 ccw(c5052.2,1874.91) 5011.23,1915.88 ; 5023.31,1927.95 ccw(c4999.41,1951.85) 5033.2,1951.85 cw(c4999.41,1951.85) 5023.31,1927.95 ; R323.2@5031.72,1936.37 cw(c5052.2,1915.88) 5052.2,1944.85 ccw(c5052.2,1915.88) R323.2@5031.72,1936.37
NetP308_7: P308.7 R312.1 | length 847.6
  Top Layer w12: R312.1@4395,1780 4395,1715 4422.2,1687.8 P308.7@4422.2,1398.74 ; 4395,1729.13 cw(c4440.87,1729.13) 4408.44,1761.56 ccw(c4440.87,1729.13) 4395,1729.13 ; 4395,1729.13 ccw(c4349.13,1729.13) 4381.56,1761.56 cw(c4349.13,1729.13) 4395,1729.13 ; 4422.2,1433.75 cw(c4387.2,1433.75) 4411.95,1408.99 ccw(c4387.2,1433.75) 4422.2,1433.75 ; 4422.2,1433.75 ccw(c4457.21,1433.75) 4432.46,1408.99 cw(c4457.21,1433.75) 4422.2,1433.75 ; 4422.2,1462.72 cw(c4358.23,1462.72) 4403.47,1417.48 ccw(c4358.23,1462.72) 4422.2,1462.72 ; 4422.2,1462.72 ccw(c4486.18,1462.72) 4440.94,1417.48 cw(c4486.18,1462.72) 4422.2,1462.72
NetP308_8: P308.8 R315.2 | length 1590.8
  Top Layer w12: R315.2@4176.5,1763.94 cw(c4136.72,1695.04) 4213.57,1715.63 ; R315.2@4177.2,1763.58 cw(c4165.37,1736.49) 4193.93,1744.14 ; R315.2@4180,1775 4180,1745 4372.2,1552.8 4372.2,1348.74 P308.8@4422.2,1298.74 ; R315.2@4182.5,1774.33 cw(c4157.21,1730.52) 4206.07,1743.61 ; 4194.18,1743.21 cw(c4216.19,1749.11) R315.2@4196.45,1760.5 ; 4384.91,1335.23 cw(c4372.4,1288.54) P308.8@4419.76,1298.24 ; 4385.71,1336.03 ccw(c4432.4,1348.55) P308.8@4422.71,1301.19 ; 4390.74,1317.28 ccw(c4428.05,1327.27) P308.8@4420.3,1289.43 ; 4403.67,1330.21 cw(c4393.67,1292.9) P308.8@4431.51,1300.65 ; 4376.97,1343.98 cw(c4331.73,1298.74) 4395.7,1298.74 ccw(c4331.73,1298.74) 4376.97,1343.98 ; 4376.97,1343.98 ccw(c4422.2,1389.22) 4422.2,1325.24 cw(c4422.2,1389.22) 4376.97,1343.98 ; 4397.45,1323.49 cw(c4372.7,1298.74) 4407.7,1298.74 ccw(c4372.7,1298.74) 4397.45,1323.49 ; 4397.45,1323.49 ccw(c4422.2,1348.25) 4422.2,1313.24 cw(c4422.2,1348.25) 4397.45,1323.49 ; R315.2@4175,1770 ccw(c4223.28,1770) 4189.14,1735.86 cw(c4223.28,1770) R315.2@4175,1770 ; R315.2@4187,1770 ccw(c4264.25,1770) 4209.63,1715.37 cw(c4264.25,1770) R315.2@4187,1770 ; R315.2@4199,1770 ccw(c4305.23,1770) 4230.11,1694.89 cw(c4305.23,1770) R315.2@4199,1770
NetP308_9: P308.9 R304.1 | length 1689.2
  Top Layer w10: R304.1@3440,1630 3440,1575 3490,1525 4195.94,1525 P308.9@4322.2,1398.74 ; 4286.47,1429.48 ccw(c4330.94,1441.39) P308.9@4321.7,1396.29 ; 4290.66,1413.85 ccw(c4327.31,1423.67) P308.9@4319.7,1386.49 ; 4291.47,1434.48 cw(c4279.55,1390.01) P308.9@4324.65,1399.24 ; 4307.1,1430.29 cw(c4297.28,1393.64) P308.9@4334.45,1401.25 ; 3440,1576.72 cw(c3488.28,1576.72) 3454.14,1610.86 ccw(c3488.28,1576.72) 3440,1576.72 ; 3440,1576.72 ccw(c3391.72,1576.72) 3425.86,1610.86 cw(c3391.72,1576.72) 3440,1576.72 ; 4275.26,1445.69 cw(c4228.31,1398.74) 4294.7,1398.74 ccw(c4228.31,1398.74) 4275.26,1445.69 ; 4275.26,1445.69 ccw(c4322.2,1492.63) 4322.2,1426.24 cw(c4322.2,1492.63) 4275.26,1445.69 ; 4292.33,1428.61 cw(c4262.46,1398.74) 4304.7,1398.74 ccw(c4262.46,1398.74) 4292.33,1428.61 ; 4292.33,1428.61 ccw(c4322.2,1458.49) 4322.2,1416.24 cw(c4322.2,1458.49) 4292.33,1428.61